# Altium PCB 468524-L.PcbDoc (part 1 of 4)
Units mm, origin at the board's own origin, x right, y up, seen from the top; angles counter-clockwise.
Board outline 160 x 90 mm, 2 copper layers (Top Layer, Bottom Layer), stack 1.571 mm thick; 225 components, 131 nets, 717 pads, 560 vias.
Unrouted connection lines stored in the file: 2.
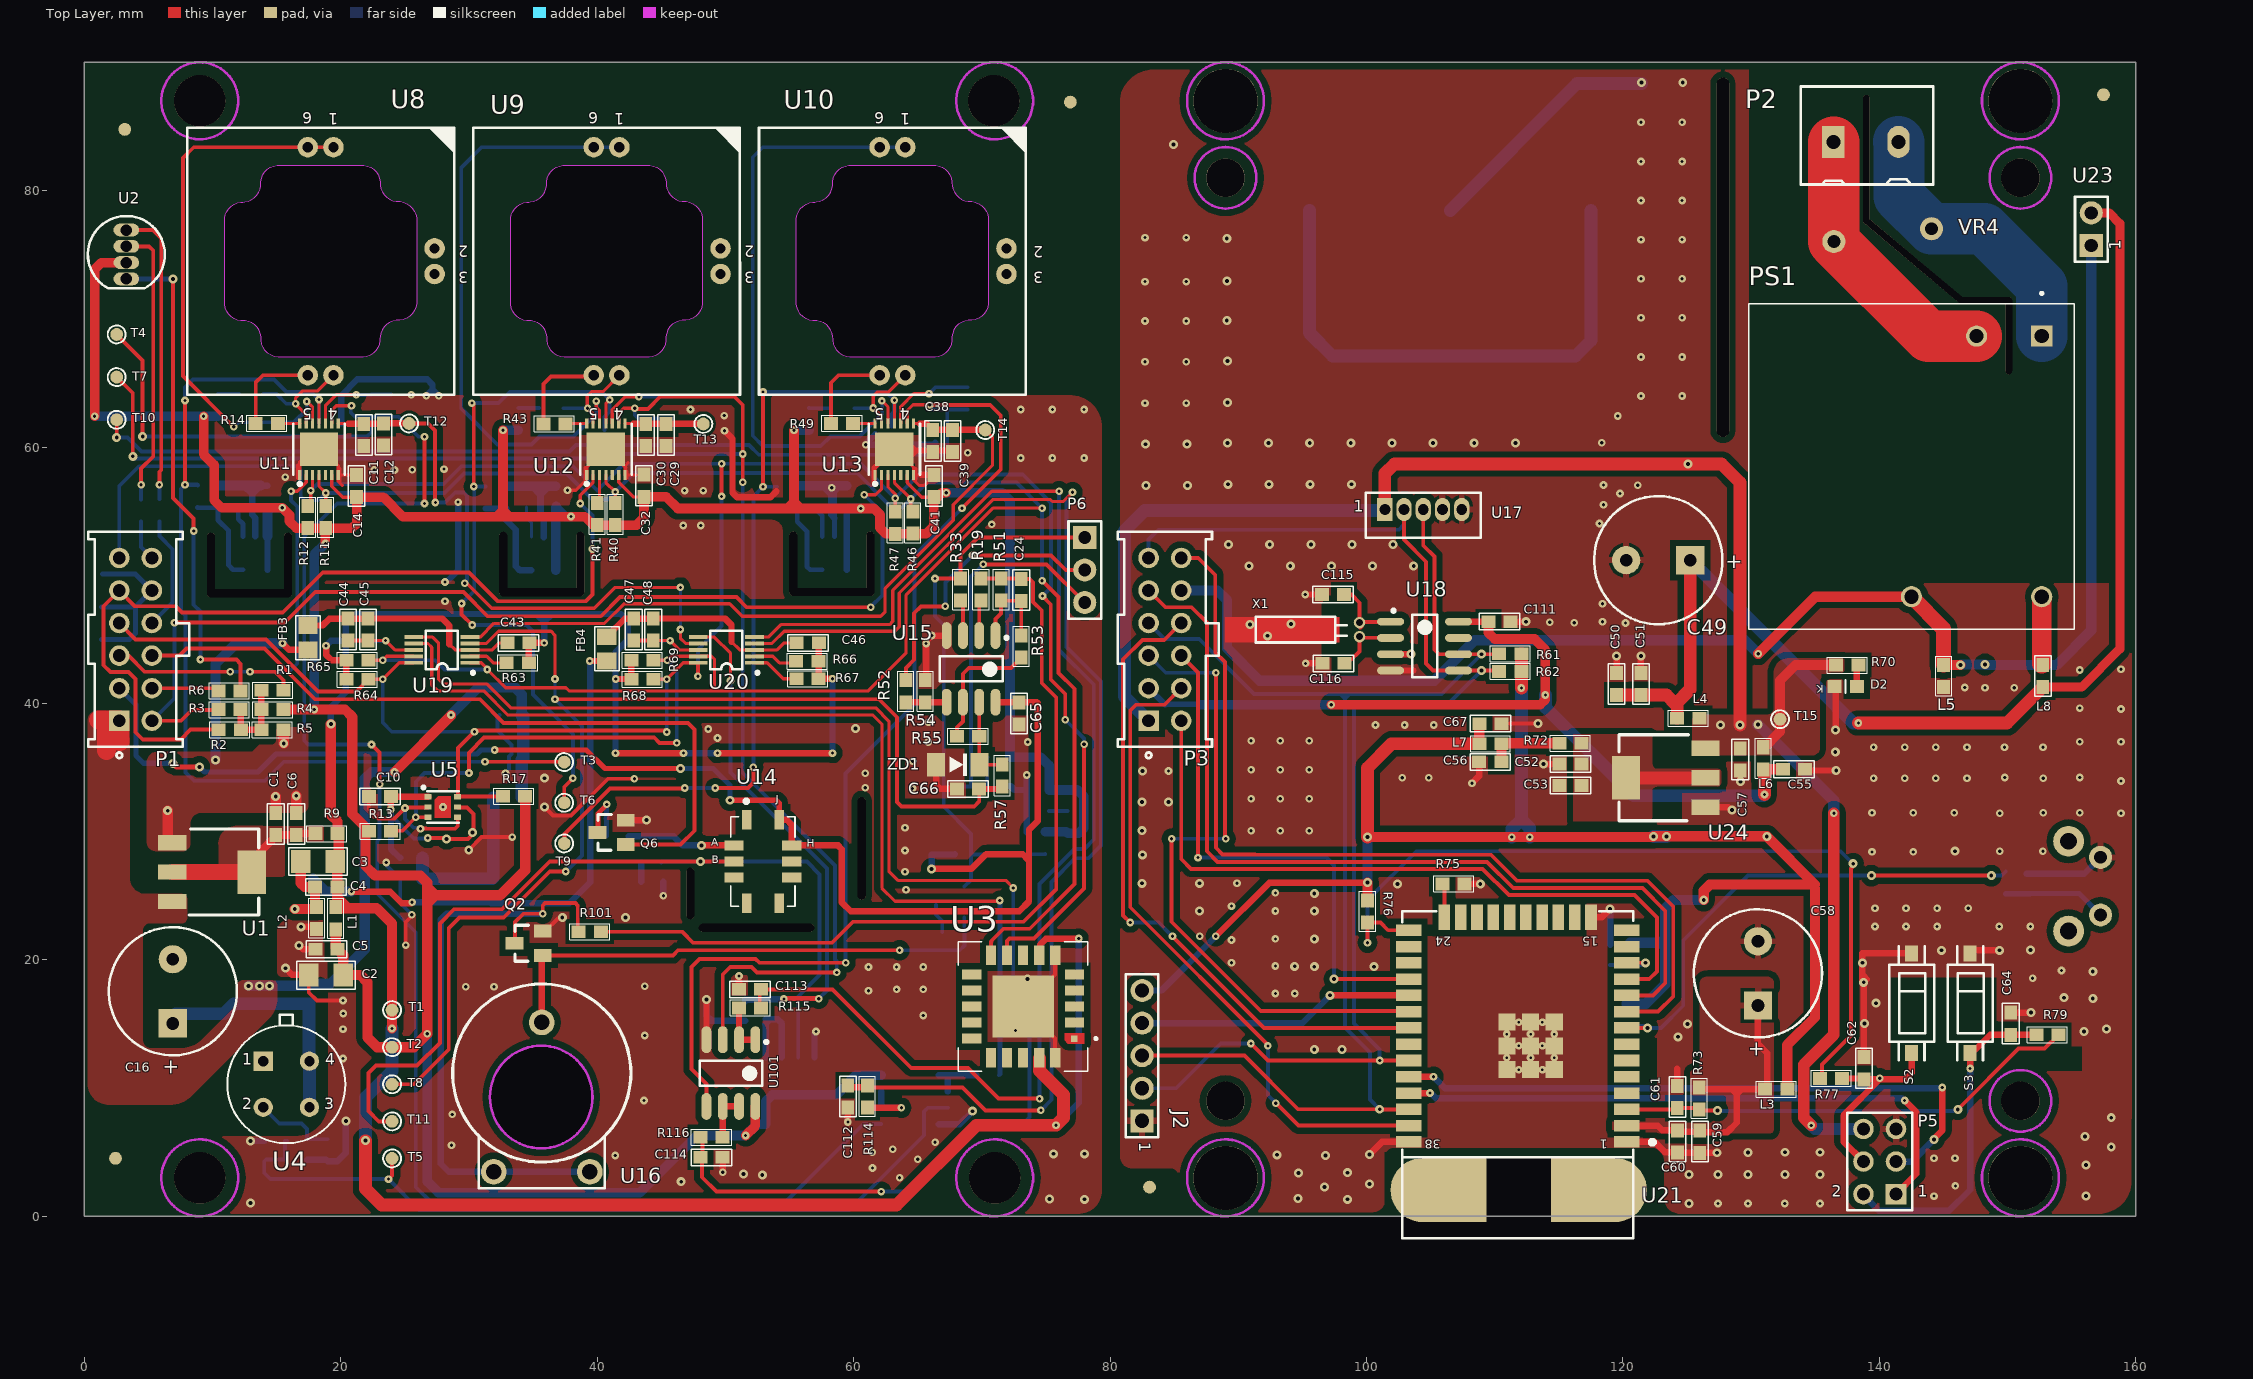
[diagram p0: Top Layer view]
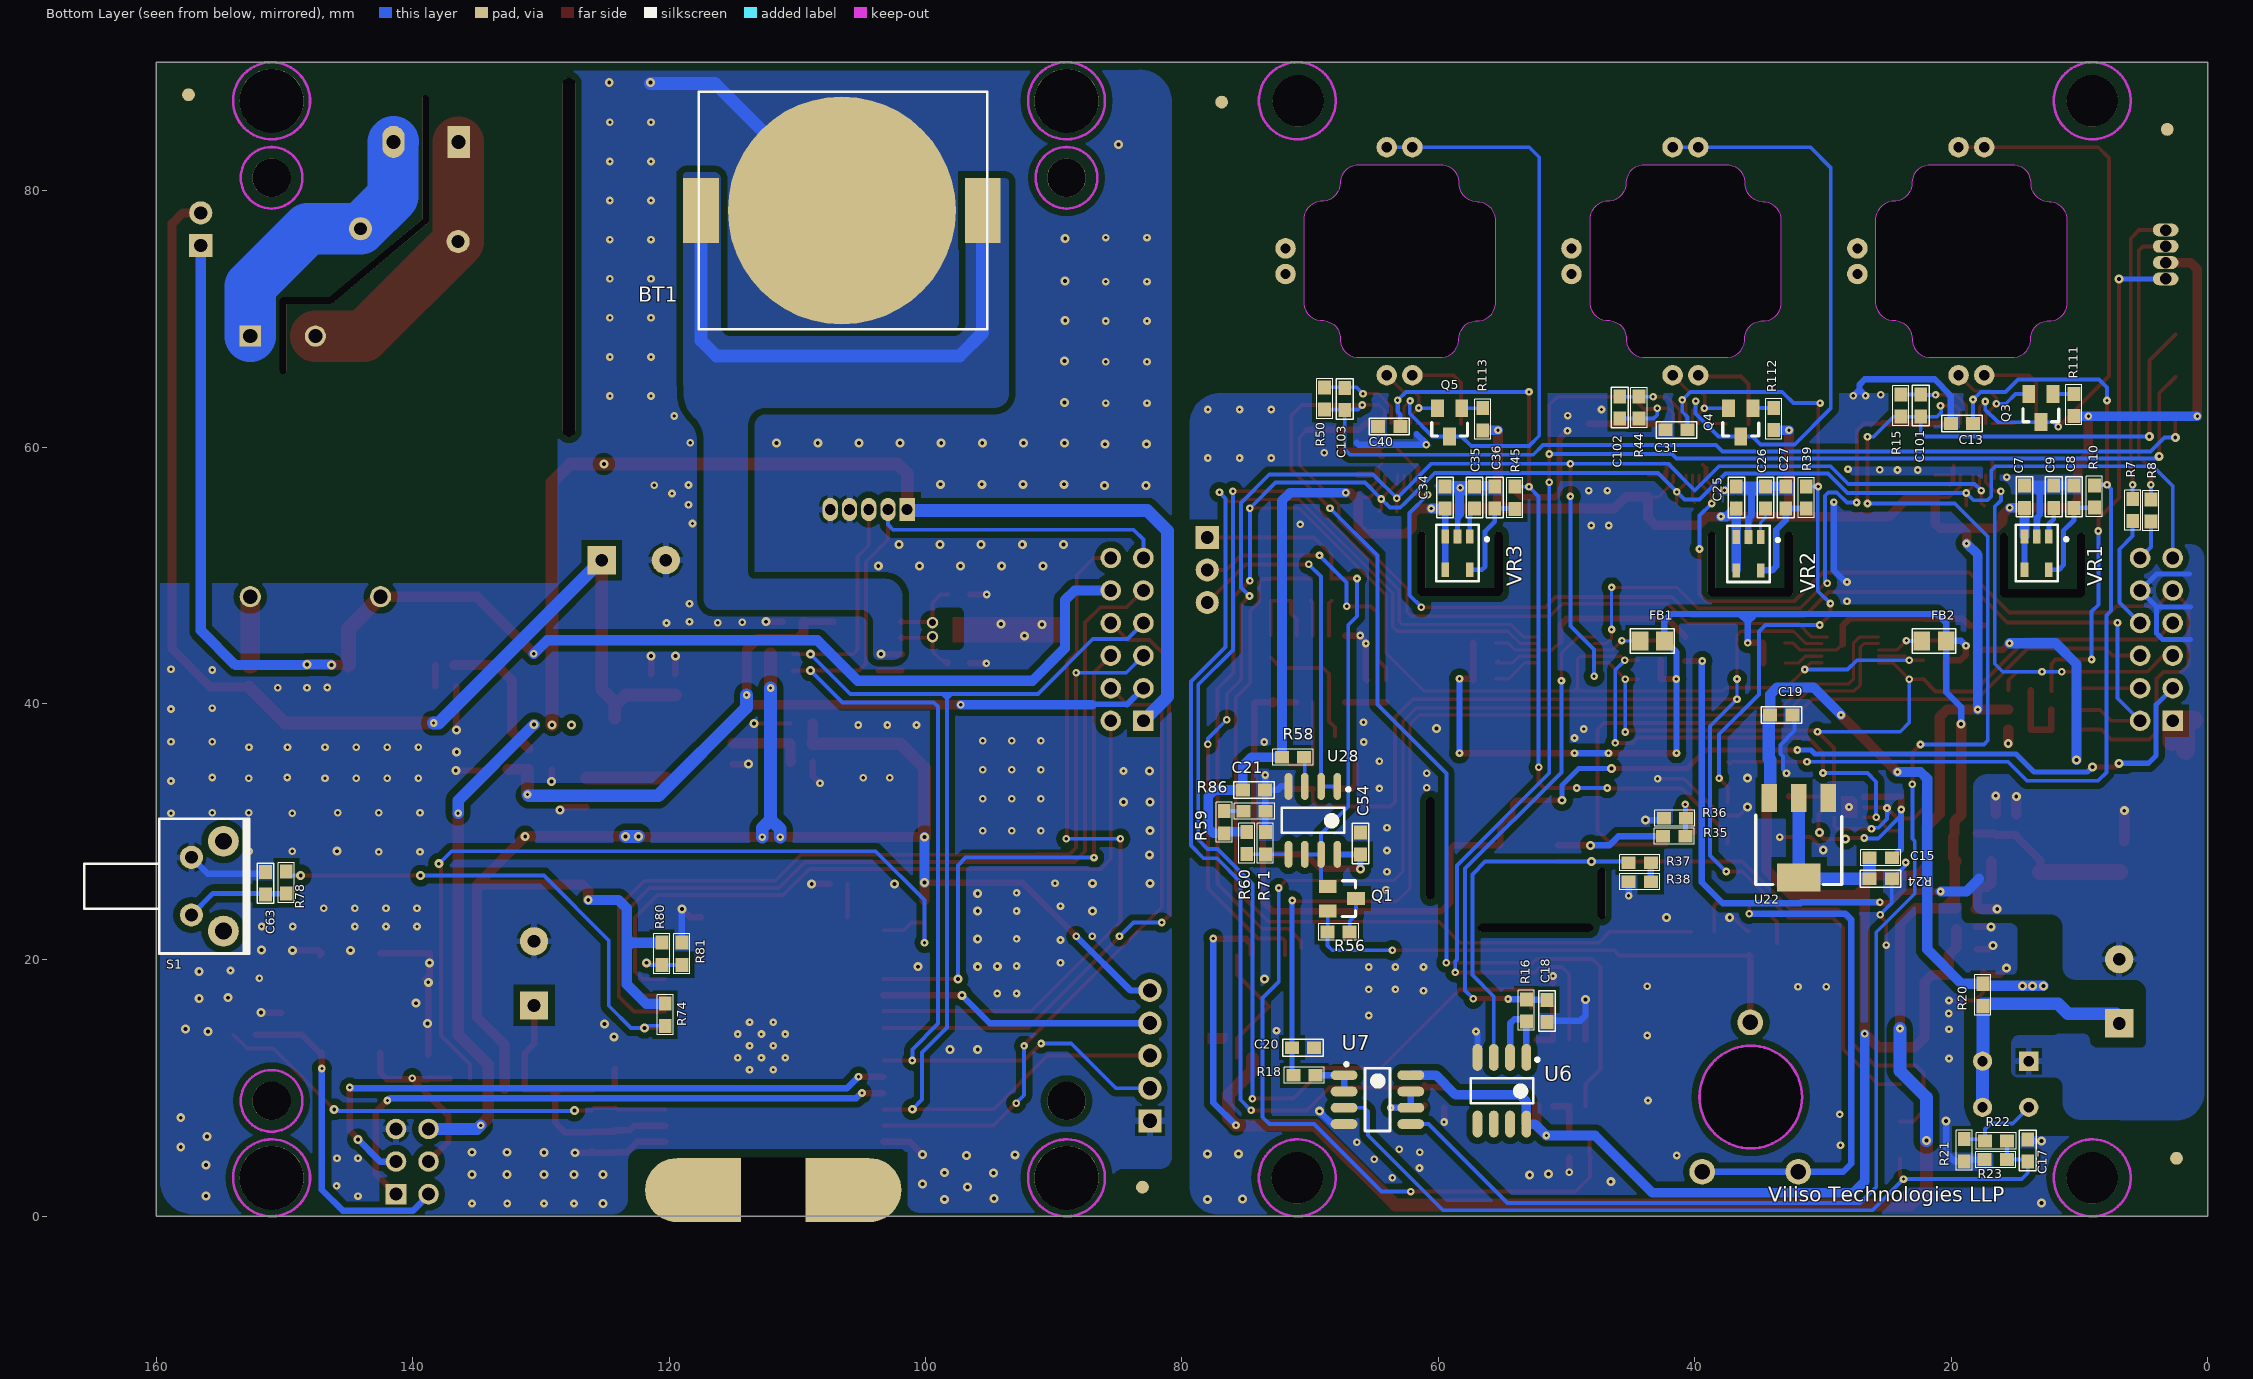
[diagram p1: Bottom Layer view, seen from below]

## Layer stack, top to bottom
Top Solder: solder mask 0.0102, Solder Resist, Dk 3.5
Top Layer: signal copper 0.0356
Dielectric 1: dielectric 1.5, FR-4, Dk 4.8
Bottom Layer: signal copper 0.0356
Bottom Solder: solder mask 0.0102, Solder Resist, Dk 3.5

## Board outline
0,0 160,0 160,90 0,90
cut-out: 36.475,13.225 37.675,12.775 38.3,12.3 38.775,11.75 39.325,10.85 39.55,10.2 39.633,9.304 39.6,8.65 39.375,7.9 39.025,7.175 38.475,6.5 37.85,5.95 36.925,5.525 36.225,5.375 35.35,5.35 34.275,5.55 33.375,5.975 32.7,6.6 32.2,7.2 31.825,8 31.65,8.9 31.65,9.45 31.825,10.575 32.575,11.875 33.575,12.725 35,13.25

## Design rules (kind name [scope] priority, off if disabled: settings)
Clearance Clearance_3 [All vs InPolygon] p1: gap=0.5 ignorepadtopadclearanceinfootprint=FALSE
Clearance Clearance_4 [All vs InComponent('X1')] p2: gap=0.127 ignorepadtopadclearanceinfootprint=FALSE
Clearance Clearance_2 [All vs InComponent('U9') or InComponent('A1') or InComponent('U22')or InComponent('U5')] p3: gap=0.1 ignorepadtopadclearanceinfootprint=FALSE
Clearance Clearance_1 [All vs InComponent('U10') OR InComponent('U13') OR InComponent('U19') OR InComponent('U21') or InComponent('U20')] p4: gap=0.2 ignorepadtopadclearanceinfootprint=TRUE except(0.1: Arc-Arc Arc-Track Arc-Fill Arc-Poly Arc-Region Track-Track Track-Fill Track-Poly Track-Region)
Clearance [All] p5: gap=0.25 ignorepadtopadclearanceinfootprint=FALSE
HoleSize [All] p1: absolutevalues=TRUE maxlimit=10 minlimit=0.025 maxpercent=80.000 minpercent=20.000
MinimumSolderMaskSliver [All] p1 off: minsoldermaskwidth=0.254
PolygonConnect [All] p1: thpad.connectstyle=Relief thpad.reliefconductorwidth=0.5 thpad.reliefentries=4 thpad.polygonreliefangle="90 Angle" thpad.airgapwidth=0.254 smdpad.connectstyle=Direct smdpad.reliefconductorwidth=0.254 smdpad.reliefentries=4 smdpad.polygonreliefangle="90 Angle" smdpad.airgapwidth=0.254 via.connectstyle=Direct via.reliefconductorwidth=0.254 via.reliefentries=4 via.polygonreliefangle="90 Angle" via.airgapwidth=0.254
RoutingVias [All] p1: holewidth=0.3 width=0.7 viastyle="Through Hole" minholewidth=0.1 minwidth=0.4 maxholewidth=0.3 maxwidth=0.7
SilkToSilkClearance [All] p1: silktosilkclearance=0.1
SilkToSolderMaskClearance [IsPad] p1 off: minsilkscreentomaskgap=0.254 clearancetoexposedcopper=TRUE
SolderMaskExpansion [All] p1: expansion=0.102 istentingtop=FALSE
Width [All] p1: maxlimit=5 minlimit=0.01 preferedwidth=0.1
26 further rules are at their usual default settings.

## Classes and differential pairs
component class MGD.SCH2: C1 C2 C3 C4 C5 C6 C7 C8 C9 C10 C11 C12 C13 C14 C15 C16 C17 C18 C19 C20 C21 C24 C25 C26 C27 C29 C30 C31 C32 C34 C35 C36 C38 C39 C40 C41 C43 C44 C45 C46 C47 C48 C54 C65 C66 C101 C102 C103 C112 C113 C114 FB1 FB2 FB3 FB4 L1 L2 P1 P6 Q1 Q2 Q3 Q4 Q5 Q6 R1 R2 R3 R4 R5 R6 R7 R8 R9 R10 R11 R12 R13 R14 R15 R16 R17 R18 R19 R20 R21 R22 R23 R24 R33 R35 R36 R37 R38 R39 R40 R41 R43 R44 R45 R46 R47 R49 R50 R51 R52 R53 R54 R55 R56 R57 R58 R59 R60 R63 R64 R65 R66 R67 R68 R69 R71 R86 R101 R111 R112 R113 R114 R115 R116 T1 T2 T3 T4 T5 T6 T7 T8 T9 T10 T11 T12 T13 T14 U1 U2 U3 U4 U5 U6 U7 U8 U9 U10 U11 U12 U13 U14 U15 U16 U19 U20 U22 U28 U101 VR1 VR2 VR3 ZD1
component class MGD.SCH1: BT1 C49 C50 C51 C52 C53 C55 C56 C57 C58 C59 C60 C61 C62 C63 C64 C67 C111 C115 C116 D2 J2 L3 L4 L5 L6 L7 L8 P2 P3 P5 PS1 R61 R62 R70 R72 R73 R74 R75 R76 R77 R78 R79 R80 R81 S1 S2 S3 T15 U17 U18 U21 U23 U24 VR4 X1

## Components (designator, comment, footprint, x,y, rotation, side; value= is the part's Value field where it differs from the comment)
BT1 "BK-912" BT1 106.525,78.45 r180 bottom
C1 "10µF" C0603 14.925,30.6 r270 top
C2 "100uF" C1206 18.85,18.825 r180 top
C3 "100uF" C1206 18.234,27.686 r180 top
C4 "10uF" C0603 18.859,25.683 r0 top
C5 "0.1µF" C0603 18.875,20.825 r0 top
C6 "10µF" C0603 16.525,30.6 r90 top
C7 "0.1µF" C0603 14.282,56.125 r270 bottom
C8 "56pF" C0603 10.425,56.125 r270 bottom
C9 "56pF" C0603 12.006,56.125 r270 bottom
C10 "0.1uF" C0603 23.05,32.743 r0 top
C11 "1uF" C0603 21.8,60.95 r90 top
C12 "0.1µF" C0603 23.325,60.975 r90 top
C13 "0.022uF" C0603 19.164,61.839 r180 bottom
C14 "0.1µF" C0603 21.225,56.95 r270 top
C15 "10µF" C0603 25.5,26.333 r0 bottom
C16 "470uF/25V" "C16, C49, C58" 6.9,17.55 r90 top
C17 "0.1uF" C0603 14.027,5.125 r270 bottom
C18 "Cap Semi" C0603 51.531,16.017 r90 bottom value=1nF
C19 "10µF" C0603 33.25,39.1 r180 bottom
C20 "Cap Semi" C0603 70.55,13.15 r0 bottom value=1nF
C21 "1uF" C0603 74.375,33.25 r0 bottom
C24 "1uF" C0603 73.075,48.85 r90 top
C25 "0.1µF" C0603 36.756,56.066 r270 bottom
C26 "56pF" C0603 34.486,56.066 r270 bottom
C27 "56pF" C0603 32.9,56.066 r270 bottom
C29 "1uF" C0603 45.359,60.95 r90 top
C30 "0.1µF" C0603 43.795,60.95 r90 top
C31 "0.022uF" C0603 41.425,61.339 r180 bottom
C32 "0.1µF" C0603 43.65,56.975 r270 top
C34 "0.1µF" C0603 59.475,56.066 r270 bottom
C35 "56pF" C0603 57.175,56.066 r270 bottom
C36 "56pF" C0603 55.6,56.066 r270 bottom
C38 "1uF" C0603 66.175,60.475 r90 top
C39 "0.1µF" C0603 67.701,60.475 r90 top
C40 "0.022uF" C0603 63.825,61.6 r180 bottom
C41 "0.1µF" C0603 66.261,56.95 r270 top
C43 "1uF" C0603 33.85,44.725 r0 top
C44 "10uF" C0603 20.564,45.764 r270 top
C45 "1uF" C0603 22.114,45.764 r270 top
C46 "1uF" C0603 56.425,44.725 r0 top
C47 "10uF" C0603 42.842,45.764 r270 top
C48 "1uF" C0603 44.367,45.764 r270 top
C49 "470uF/25V" "C16, C49, C58" 122.75,51.175 r180 top
C50 "10uF" C0603 119.499,41.52 r90 top
C51 "0.1UF" C0603 121.399,41.52 r90 top
C52 "10µF" C0603 115.9,35.27 r0 top
C53 "10µF" C0603 115.9,33.598 r180 top
C54 "1uF" C0603 66.075,29.081 r270 bottom
C55 "0.1µF" C0603 133.346,34.87 r180 top
C56 "10uF" C0603 109.645,35.445 r0 top
C57 "0.1µF" C0603 129.146,35.637 r90 top
C58 "470uF/25V" "C16, C49, C58" 130.525,18.95 r90 top
C59 "10µF" C0603 125.997,5.822 r90 top
C60 "0.1µF" C0603 124.247,5.847 r90 top
C61 "0.1µF" C0603 124.245,9.3 r270 top
C62 "1nF" C0603 138.8,11.55 r270 top
C63 "1nF" C0603 151.475,25.975 r270 bottom
C64 "1nF" C0603 150.25,15.025 r270 top
C65 "1uF" C0603 72.9,39.225 r90 top
C66 "1uF" C0603 68.925,33.325 r0 top
C67 "0.1µF" C0603 109.674,38.426 r180 top
C101 "10uF" C0603 22.371,63.225 r270 bottom
C102 "10uF" C0603 45.85,63.089 r270 bottom
C103 "10uF" C0603 67.3,63.757 r270 bottom
C111 "1uF" C0603 110.381,46.381 r180 top
C112 "Cap Semi" C0603 59.55,9.35 r90 top value=1nF
C113 "Cap Semi" C0603 51.925,17.7 r0 top value=1nF
C114 "Cap Semi" C0603 48.925,4.6 r180 top value=1nF
C115 "0.1UF" C0603 97.375,48.5 r0 top
C116 "0.1UF" C0603 97.425,43.125 r0 top
D2 "LED_GREEN" "D2              L0603" 137.371,41.32 r180 top
FB1 "FB 1.5K" "FB1, FB2, FB3, FB4" 43.317,44.875 r180 bottom
FB2 "FB 1.5K" "FB1, FB2, FB3, FB4" 21.35,44.875 r180 bottom
FB3 "FB 1.5K" "FB1, FB2, FB3, FB4" 17.45,45.125 r270 top
FB4 "FB 1.5K" "FB1, FB2, FB3, FB4" 40.75,44.264 r270 top
J2 "CON_5-BERG_HDC2080" J2 82.5,12.53 r180 top
L1 "1uH" "L3, L4, L5, L6, L7" 19.6,23.25 r270 top
L2 "1uH" "L3, L4, L5, L6, L7" 18.107,23.275 r270 top
L3 "1uH" "L3, L4, L5, L6, L7" 131.95,9.925 r180 top
L4 "1uH" "L3, L4, L5, L6, L7" 125.096,38.845 r0 top
L5 "1uH" "L3, L4, L5, L6, L7" 145.002,42.143 r270 top
L6 "1uH" "L3, L4, L5, L6, L7" 130.946,35.72 r270 top
L7 "1uH" "L3, L4, L5, L6, L7" 109.66,36.851 r180 top
L8 "1uH" C0603 152.75,42.143 r270 top
P1 "Header 6X2" P1,P3_Updated 3.995,45 r90 top locked
P2 "Header 2" "TE 282834-2" 138.95,83.8 r180 top
P3 "Header 6X2" P1,P3_Updated 84.275,45 r90 top locked
P5 "Header 3X2" "P5 - NEW" 140.025,4.272 r180 top
P6 "Header 3" P6 78.025,50.411 r270 top
PS1 "" CONV_LD05-23B03R2 142.5,58.485 r270 top
Q1 "JFET-N" Q1-Q2 67.525,24.775 r270 bottom
Q2 "JFET-N" Q1-Q2 34.65,21.3 r90 top
Q3 "MOSFET-P" Q3-Q5,Q6 13.008,63.037 r0 bottom
Q4 "MOSFET-P" Q3-Q5,Q6 36.413,61.925 r0 bottom
Q5 "MOSFET-P" Q3-Q5,Q6 59.125,61.925 r0 bottom
Q6 "BSS138" Q3-Q5,Q6 41.125,29.94 r90 top
R1 "0E/DNP" R0603 14.675,41.025 r180 top
R2 "0E/DNP" R0603 11.339,37.955 r0 top
R3 "0E/DNP" R0603 11.325,39.525 r0 top
R4 "0E/DNP" R0603 14.675,39.525 r180 top
R5 "0E/DNP" R0603 14.675,37.955 r0 top
R6 "10K" R0603 11.325,40.975 r0 top
R7 "10K" R0603 5.85,55.075 r90 bottom
R8 "10K" R0603 4.425,55.05 r90 bottom
R9 "0E" R0603 18.888,29.85 r180 top
R10 "0E" R0603 8.825,56.151 r90 bottom
R11 "10K/DNP" R0603 18.829,54.537 r90 top
R12 "10K/DNP" R0603 17.429,54.537 r90 top
R13 "10K/DNP" R0603 23.05,30.029 r180 top
R14 "49.9E" R0603 14.225,61.839 r0 top
R15 "510K" R0603 23.921,63.225 r90 bottom
R16 "10K" R0603 53.131,16.065 r270 bottom
R17 "10K/DNP" R0603 33.513,32.761 r0 top
R18 "10K" R0603 70.45,11 r180 bottom
R19 "10K" R0603 69.931,48.875 r270 top
R20 "0E" R0603 17.525,17.275 r90 bottom
R21 "1K" R0603 18.975,5.15 r270 bottom
R22 "1K" R0603 16.502,5.875 r0 bottom
R23 "2K" R0603 16.527,4.425 r180 bottom
R24 "0E" R0603 25.5,27.955 r0 bottom
R33 "10K" R0603 68.336,48.875 r270 top
R35 "75E" R0603 41.6,29.645 r0 bottom
R36 "56E" R0603 41.55,31.037 r180 bottom
R37 "820E" R0603 44.295,27.587 r0 bottom
R38 "0E" R0603 44.295,26.093 r180 bottom
R39 "0E" R0603 31.3,56.066 r90 bottom
R40 "10K/DNP" R0603 41.4,54.775 r90 top
R41 "0E/DNP" R0603 39.993,54.775 r90 top
R43 "49.9E" R0603 36.675,61.8 r0 top
R44 "100K" R0603 44.35,63.075 r90 bottom
R45 "0E" R0603 54.025,56.041 r90 bottom
R46 "10K/DNP" R0603 64.625,54.1 r90 top
R47 "0E/DNP" R0603 63.236,54.093 r90 top
R49 "49.9E" R0603 59.102,61.839 r0 top
R50 "100K" R0603 68.875,63.793 r90 bottom
R51 "470K" R0603 71.5,48.875 r270 top
R52 "10K" R0603 64.075,40.95 r270 top
R53 "10K" R0603 73.075,44.45 r270 top
R54 "100K" R0603 65.575,40.95 r270 top
R55 "100K" R0603 68.931,37.446 r0 top
R56 "2M" R0603 67.775,22.175 r0 bottom
R57 "100E" R0603 71.581,34.37 r270 top
R58 "100k" R0603 71.325,35.8 r180 bottom
R59 "100K" R0603 76.7,30.739 r270 bottom
R60 "130K" R0603 74.948,29.123 r90 bottom
R61 "10K/DNP/TX" R0603 111.214,43.875 r0 top
R62 "10K/DNP/TX" R0603 111.214,42.495 r0 top
R63 "10K" R0603 33.8,43.165 r180 top
R64 "10K" R0603 21.3,41.895 r0 top
R65 "10K" R0603 21.3,43.365 r0 top
R66 "10K" R0603 56.375,43.29 r180 top
R67 "10K" R0603 56.4,41.925 r180 top
R68 "10K" R0603 43.52,41.895 r0 top
R69 "10K" R0603 43.52,43.365 r0 top
R70 "10K" R0603 137.496,42.995 r0 top
R71 "200K" R0603 73.486,29.098 r270 bottom
R72 "0E" R0603 115.896,36.895 r0 top
R73 "10K" R0603 125.947,9.2 r270 top
R74 "10K" R0603 120.3,15.725 r270 bottom
R75 "10K" R0603 106.779,25.925 r180 top
R76 "10K" R0603 100.075,23.775 r270 top
R77 "470E" R0603 136.225,10.75 r180 top
R78 "470E" R0603 149.85,26.025 r90 bottom
R79 "470E" R0603 153.1,14.15 r0 top
R80 "10K/ NTC" R0603 120.551,20.48 r270 bottom
R81 "10K" R0603 118.996,20.48 r90 bottom
R86 "100K" R0603 74.35,31.593 r0 bottom
R101 "75E" R0603 39.414,22.2 r0 top
R111 "10K" R0603 10.425,63.275 r270 bottom
R112 "10K" R0603 33.844,62.175 r270 bottom
R113 "10K" R0603 56.525,62.164 r270 bottom
R114 "10K" R0603 61.075,9.35 r270 top
R115 "10K" R0603 51.925,16.25 r180 top
R116 "10K" R0603 48.925,6.175 r0 top
S1 "SW-SPST" S1 156,25.75 r90 bottom locked
S2 "SW-PB" "S2, S3" 142.515,16.625 r90 top
S3 "SW-PB" "S2, S3" 147.075,16.625 r90 top
T1 "TEST POINT" TP 24,16.082 r0 top
T2 "TEST POINT" TP 24,13.191 r0 top
T3 "TEST POINT" TP 37.425,35.425 r0 top
T4 "TEST POINT" TP 2.52,68.783 r0 top
T5 "TEST POINT" TP 24,4.517 r0 top
T6 "TEST POINT" TP 37.425,32.255 r0 top
T7 "TEST POINT" TP 2.52,65.454 r0 top
T8 "TEST POINT" TP 24,10.3 r90 top
T9 "TEST POINT" TP 37.425,29.085 r0 top
T10 "TEST POINT" TP 2.52,62.125 r0 top
T11 "TEST POINT" TP 24,7.408 r0 top
T12 "TEST POINT" TP 25.325,61.839 r90 top
T13 "TEST POINT" TP 48.275,61.8 r90 top
T14 "TEST POINT" TP 70.264,61.325 r90 top
T15 "TEST POINT" TP 132.246,38.77 r0 top
U1 "='Texas Instruments'PartNumber" "U1, U24              SOT-223" 9.95,26.85 r270 top
U2 "RGB_LED" U2 3.275,75.018 r180 top
U3 "SCD41" XDCR_SCD41-D-R2 73.215,16.364 r180 top
U4 "TGS2610" U4 15.752,10.3 r0 top
U5 "SGP30" SGP30 27.965,31.925 r0 top locked
U6 "LM258DT" "U6, U8                    SOIC-8N" 55.041,9.795 r270 bottom
U7 "LM258DT" "U6, U8                    SOIC-8N" 64.747,9.1 r180 bottom
U8 "SPEC_SENS_PTH_SO2" "U3, U7, U11" 18.425,74.49 r180 top locked
U9 "SPEC_SENS_PTH_SO2" "U3, U7, U11" 40.725,74.49 r180 top locked
U10 "SPEC_SENS_PTH_SO2" "U3, U7, U11" 63.025,74.49 r180 top locked
U11 "LMP91000SD/NOPB" "U5, U10, U13" 18.3,59.825 r90 top
U12 "LMP91000SD/NOPB" "U5, U10, U13" 40.675,59.825 r90 top
U13 "LMP91000SD/NOPB" "U5, U10, U13" 63.175,59.825 r90 top
U14 "MICS2714_NO2" U12 52.925,27.675 r0 top
U15 "LM258DT" "U6, U8                    SOIC-8N" 69.156,42.695 r270 top
U16 "TGS5141_CO" U16 35.675,9.3 r0 top
U17 "SPS30" U17 104.425,54.225 r180 top
U18 "DS1307Z" "U18 new" 104.525,44.476 r0 top
U19 "ADS1115IDGSR-MSOP" "U19, U20" 27.875,44.175 r180 top
U20 "ADS1115IDGSR-MSOP" "U19, U20" 50.063,44.175 r180 top
U21 "ESP_32" "U20             ESP 32" 111.792,14.557 r180 top
U22 "='Texas Instruments'PartNumber" "U1, U24              SOT-223" 31.885,29.525 r0 bottom
U23 "RST_CON_BERG_2.54MM" U23 156.525,76.995 r180 top
U24 "='Texas Instruments'PartNumber" "U1, U24              SOT-223" 123.346,34.2 r90 top
U28 "LM258DT" U28 69.779,30.877 r270 bottom
U101 "LM258DT" "U6, U8                    SOIC-8N" 50.425,11.175 r270 top
VR1 "LM4120AIM5-2.5" "VR1, VR2, VR3" 13.332,51.729 r0 bottom
VR2 "LM4120AIM5-2.5" "VR1, VR2, VR3" 35.813,51.674 r0 bottom
VR3 "LM4120AIM5-2.5" "VR1, VR2, VR3" 58.502,51.724 r0 bottom
VR4 "" Mov 140.25,76.525 r180 top value="=Resistance In Ohms @ 25C"
X1 "32.768kHz" XTAL 99.45,45.755 r90 top
ZD1 "D Zener" ZD1 68.131,35.221 r0 top

## Footprints (in the part's own frame and the unit in brackets; to place one, negate y for a bottom-side part, rotate by r counter-clockwise, add the part's x,y. Pads: shape width x height; smd on the part's side, far side on the other; paste and mask are expansions set on the pad)
BT1 [mm]
  round 17.78 smd: 1(0,0)
  rect 2.79x5.08 smd: S1(-10.985,0) S2(10.985,0)
  silkscreen extent -11.15,-9.25 11.35,9.28, body extent -11.23,-7.82 11.63,7.42, height 4.32
"C16, C49, C58" [mm]
  rect 2.2x2.2 hole 1: 1(-2.5,0)
  round 2.2 hole 1: 2(2.5,0)
  silkscreen extent -5,-5 5,5
C0603 [mil]
  rect 43x39 smd: 1(-34.03,0) 2(34.03,0)
  silkscreen extent -62,-26 62,26, body extent -31,-16 31,16, height 12
C1206 [mil]
  rect 60x70.9 smd paste+0 mask+4: 1(-53,0) 2(53,0)
  silkscreen extent -90,-42 90,43, body extent -63,-31 63,31, height 39
CONV_LD05-23B03R2 [mm]
  rect 1.65x1.65 hole 1.1: 1(-10.16,10.16)
  round 1.65 hole 1.1: 2(-10.16,5.08) 4(10.16,0) 5(10.16,10.16)
  silkscreen extent -13.6,-12.7 12.7,12.7, body extent -12.7,-12.7 12.7,12.7, height 17.6
"D2              L0603" [mil]
  rect 43x39 smd: 1(-34,0) 2(34,0)
  silkscreen extent 0,-20 0,20, body extent -32,-16 31,16, height 24
"FB1, FB2, FB3, FB4" [mil] "R0603"
  rect 51x59 smd: 1(-37.5,0) 2(37.5,0)
  silkscreen extent -67,-37 67,37, body extent -39,-24 39,24, height 37
J2 [mm]
  rect 1.8x1.8 hole 1.1: 1(0,5.08)
  round 1.8 hole 1.1: 2(0,2.54) 3(0,0) 4(0,-2.54) 5(0,-5.08)
  silkscreen extent -1.27,-6.35 1.27,6.35, body extent -1.27,-6.35 1.27,6.35, height 9.07
"L3, L4, L5, L6, L7" [mil] "R0603"
  rect 43x39 smd: 1(-34,0) 2(34,0)
  silkscreen extent -61,-25 61,25, body extent -33,-16 33,16, height 22
Mov [mm]
  round 1.8 hole 1: 1(-3.81,-0.5) 2(3.8,0.5)
  body extent -5.5,-0.9 5.8,0.95, height 18.5
P1,P3_Updated [mm]
  rect 1.6x1.6 hole 1: 1(-6.35,1.27)
  round 1.6 hole 1: 2(-3.81,1.27) 3(-1.27,1.27) 4(1.27,1.27) 5(3.81,1.27) 6(6.35,1.27) 7(-6.35,-1.27) 8(-3.81,-1.27) 9(-1.27,-1.27) 10(1.27,-1.27) 11(3.81,-1.27) 12(6.35,-1.27)
  silkscreen extent -9.27,-4.2 8.38,3.67
"P5 - NEW" [mm]
  rect 1.6x1.6 hole 1: 1(-1.27,2.54)
  round 1.6 hole 1: 2(1.27,2.54) 3(-1.27,0) 4(1.27,0) 5(-1.27,-2.54) 6(1.27,-2.54)
  silkscreen extent -2.54,-3.81 2.54,3.81, body extent -2.54,-3.81 2.54,3.81, height 8.57
P6 [mm]
  rect 1.8x1.8 hole 1: 1(-2.54,0)
  round 1.8 hole 1: 2(0,0) 3(2.54,0)
  silkscreen extent -3.81,-1.27 3.81,1.27, body extent -3.78,-1.22 3.84,1.32, height 9.07
Q1-Q2 [mm]
  rect 1x1.4 smd: 1(-0.95,-1.1) 2(0,1.1) 3(0.95,-1.1)
  silkscreen extent -1.4,0.04 1.4,1.06, body extent -1.5,-1.25 1.5,1.25, height 1.55
Q3-Q5,Q6 [mm]
  rect 1x1.4 smd: 1(-0.95,-1.1) 2(0.95,-1.1) 3(0,1.1)
  silkscreen extent -1.4,0.04 1.4,1.06, body extent -1.5,-1.25 1.5,1.25, height 1.55
R0603 [mil] "R0603"
  rect 43x39 smd: 1(-34,0) 2(34,0)
  silkscreen extent -62,-25 61,25, body extent -33,-16 33,16, height 22
S1 [mm]
  round 1.8 hole 1: 1(-2.25,1.25) 2(2.25,1.25)
  round 2.4 hole 1.3: ""(-3.5,-1.25) ""(3.5,-1.25)
  silkscreen extent -5.38,-3.25 5.32,9.6
"S2, S3" [mm]
  rect 1.25x1 smd: 1(-3.875,0) 2(3.875,0)
  silkscreen extent -4.46,-1.75 4.45,1.75
SGP30 [mm]
  rect 0.55x0.4 smd paste-1: 1(-1.15,0.8) 2(-1.15,0) 3(-1.15,-0.8) 4(1.15,-0.8) 5(1.15,0) 6(1.15,0.8)
  rect 0.305x0.61 smd paste-1 mask+0: DIEPAD(0,0)
  Top Layer region: 0.625,-0.85 -0.625,-0.85 -0.625,0.575 -0.35,0.85 0.625,0.85
  silkscreen extent -1.65,-1.22 1.22,1.65, body extent -1.22,-1.22 1.22,1.22, height 0.88
"TE 282834-2" [mm]
  oval 1.75x2.5 hole 1.1: 1(-2.54,0)
  rect 1.75x2.5 hole 1.1: 2(2.54,0)
  silkscreen extent -5.24,-4.32 5.08,3.33, body extent -5.08,-4.33 5.08,3.17, height 10
TP [mm]
  round 1 smd paste-1 mask+0.102: 1(0,0)
  silkscreen extent -0.7,-0.7 0.7,0.7
"U1, U24              SOT-223" [mm]
  rect 1.2x2.2 smd: 1(-2.3,-3.1) 2(0,-3.1) 3(2.3,-3.1)
  rect 3.4x2.2 smd: 4(0,3.1)
  silkscreen extent -3.35,-1.77 3.35,3.65, body extent -3.26,-3.47 3.24,3.49, height 1.9
U2 [mm]
  oval 2x1 hole 0.9: 1(0,1.905) 2(0,0.635) 3(0,-0.635) 4(0,-1.905)
  silkscreen extent -3,-3 3,2.65
"U3, U7, U11" [mm]
  round 1.6 hole 0.8: 1(-1,-8.89) 2(-8.89,-1) 3(-8.89,1) 4(-1,8.89) 5(1,8.89) 6(1,-8.89)
  Keep-Out Layer board cut-out: 3.597,7.442 3.863,7.331 4.103,7.171 4.307,6.967 4.467,6.727 4.578,6.461 4.634,6.178 4.634,6.034 4.641,5.898 4.694,5.63 4.798,5.378 4.95,5.152 5.143,4.959 5.369,4.807 5.621,4.703 5.889,4.65 6.025,4.643 6.209,4.643 6.483,4.588 6.742,4.481 6.974,4.326 7.172,4.128 7.327,3.896 7.434,3.637 7.489,3.363 7.489,3.223 7.489,-3.199 7.489,-3.339 7.434,-3.613 7.327,-3.872 7.172,-4.104 6.974,-4.302 6.742,-4.457 6.483,-4.564 6.209,-4.619 6.069,-4.619 5.931,-4.626 5.661,-4.68 5.406,-4.785 5.177,-4.938 4.982,-5.133 4.829,-5.362 4.724,-5.617 4.67,-5.887 4.663,-6.025 4.663,-6.068 4.663,-6.206 4.609,-6.478 4.503,-6.734 4.349,-6.964 4.153,-7.16 3.923,-7.314 3.667,-7.42 3.395,-7.474 -3.374,-7.474 -3.646,-7.42 -3.902,-7.314 -4.132,-7.16 -4.328,-6.964 -4.482,-6.734 -4.588,-6.478 -4.642,-6.206 -4.642,-6.068 -4.649,-5.93 -4.703,-5.66 -4.808,-5.405 -4.961,-5.176 -5.156,-4.981 -5.385,-4.828 -5.64,-4.723 -5.91,-4.669 -6.048,-4.662 -6.202,-4.662 -6.476,-4.607 -6.735,-4.5 -6.968,-4.345 -7.166,-4.147 -7.321,-3.914 -7.428,-3.655 -7.483,-3.381 -7.483,-3.241 -7.483,3.165 -7.483,3.308 -7.427,3.588 -7.318,3.851 -7.16,4.089 -6.958,4.291 -6.72,4.449 -6.457,4.558 -6.177,4.614 -6.034,4.614 -5.896,4.621 -5.626,4.675 -5.371,4.78 -5.142,4.933 -4.947,5.128 -4.794,5.357 -4.689,5.612 -4.635,5.882 -4.628,6.02 -4.628,6.049 -4.628,6.192 -4.572,6.472 -4.463,6.735 -4.305,6.973 -4.103,7.175 -3.865,7.333 -3.602,7.442 -3.322,7.498 3.314,7.498
  Keep-Out Layer region: -7.483,3.165 -7.483,3.308 -7.427,3.588 -7.318,3.851 -7.16,4.089 -6.958,4.291 -6.72,4.449 -6.457,4.558 -6.177,4.614 -6.034,4.614 -5.896,4.621 -5.626,4.675 -5.371,4.78 -5.142,4.933 -4.947,5.128 -4.794,5.357 -4.689,5.612 -4.635,5.882 -4.628,6.02 -4.628,6.02 -4.628,6.049 -4.628,6.192 -4.572,6.472 -4.463,6.735 -4.305,6.973 -4.103,7.175 -3.865,7.333 -3.602,7.442 -3.322,7.498 -3.179,7.498 -3.179,7.498 3.17,7.498 3.314,7.498 3.597,7.442 3.863,7.331 4.103,7.171 4.307,6.967 4.467,6.727 4.578,6.461 4.634,6.178 4.634,6.034 4.641,5.898 4.694,5.63 4.798,5.378 4.95,5.152 5.143,4.959 5.369,4.807 5.621,4.703 5.889,4.65 6.025,4.643 6.025,4.643 6.069,4.643 6.209,4.643 6.483,4.588 6.742,4.481 6.974,4.326 7.172,4.128 7.327,3.896 7.434,3.637 7.489,3.363 7.489,3.223 7.489,3.223 7.489,-3.199 7.489,-3.339 7.434,-3.613 7.327,-3.872 7.172,-4.104 6.974,-4.302 6.742,-4.457 6.483,-4.564 6.209,-4.619 6.069,-4.619 5.931,-4.626 5.661,-4.68 5.406,-4.785 5.177,-4.938 4.982,-5.133 4.829,-5.362 4.724,-5.617 4.67,-5.887 4.663,-6.025 4.663,-6.025 4.663,-6.068 4.663,-6.206 4.609,-6.478 4.503,-6.734 4.349,-6.964 4.153,-7.16 3.923,-7.314 3.667,-7.42 3.395,-7.474 3.257,-7.474 3.257,-7.474 -3.236,-7.474 -3.374,-7.474 -3.646,-7.42 -3.902,-7.314 -4.132,-7.16 -4.328,-6.964 -4.482,-6.734 -4.588,-6.478 -4.642,-6.206 -4.642,-6.068 -4.649,-5.93 -4.703,-5.66 -4.808,-5.405 -4.961,-5.176 -5.156,-4.981 -5.385,-4.828 -5.64,-4.723 -5.91,-4.669 -6.048,-4.662 -6.048,-4.662 -6.062,-4.662 -6.202,-4.662 -6.476,-4.607 -6.735,-4.5 -6.968,-4.345 -7.166,-4.147 -7.321,-3.914 -7.428,-3.655 -7.483,-3.381 -7.483,-3.241 -7.483,-3.241
  silkscreen extent -10.41,-10.41 10.41,10.41
U4 [mm]
  rect 1.5x1.5 hole 0.8: 1(-1.8,1.8)
  round 1.5 hole 0.8: 2(-1.8,-1.8) 3(1.8,-1.8) 4(1.8,1.8)
  silkscreen extent -4.6,-4.6 4.6,5.43
"U5, U10, U13" [mm]
  rect 0.8x0.25 smd: 1(-2,1.5) 2(-2,1) 3(-2,0.5) 4(-2,0) 5(-2,-0.5) 6(-2,-1) 7(-2,-1.5) 8(2,-1.5) 9(2,-1) 10(2,-0.5) 11(2,0) 12(2,0.5) 13(2,1) 14(2,1.5)
  rect 2.6x3 smd: 15(0,0)
  silkscreen extent -2.82,-2 2,2
"U6, U8                    SOIC-8N" [mm]
  oval 2.1x0.762 smd: 1(-2.6,1.905) 2(-2.6,0.635) 3(-2.6,-0.635) 4(-2.6,-1.905) 5(2.6,-1.905) 6(2.6,-0.635) 7(2.6,0.635) 8(2.6,1.905)
  silkscreen extent -2.55,-2.44 0.98,2.89, body extent -2.99,-2.45 3,2.45, height 1.7
U12 [mm]
  rect 0.762x1.5 smd: 1(-1.27,3.25) 5(-1.27,-3.25) 6(1.27,-3.25) 10(1.27,3.25)
  rect 1.5x0.762 smd: 2(-2.25,1.25) 3(-2.25,0) 4(-2.25,-1.25) 7(2.25,-1.25) 8(2.25,0) 9(2.25,1.25)
  silkscreen extent -2.5,-3.5 2.5,4.84
U16 [mm] "Connector; Header; 9 Position"
  round 2 hole 1.2: 1(0,5.825) 2(-3.75,-5.825) 3(3.75,-5.825)
  silkscreen extent -6.95,-7.12 6.95,8.82
U17 [mm]
  rect 1.2x1.8 hole 0.85: 1(3,-0.9)
  oval 1.2x1.8 hole 0.85: 2(1.5,-0.9) 3(0,-0.9) 4(-1.5,-0.9) 5(-3,-0.9)
  silkscreen extent -4.5,-2.2 4.5,1.3
"U18 new" [mm]
  oval 2.1x0.6 smd: 1(-2.65,1.905) 2(-2.65,0.635) 3(-2.65,-0.635) 4(-2.65,-1.905) 5(2.65,-1.905) 6(2.65,-0.635) 7(2.65,0.635) 8(2.65,1.905)
  silkscreen extent -2.55,-2.44 0.98,2.89, body extent -2.99,-2.45 3,2.45, height 1.7
"U19, U20" [mm]
  rect 1.45x0.3 smd mask+0.08: 1(-2.2,1) 2(-2.2,0.5) 3(-2.2,0) 4(-2.2,-0.5) 5(-2.2,-1) 6(2.2,-1) 7(2.2,-0.5) 8(2.2,0) 9(2.2,0.5) 10(2.2,1)
  silkscreen extent -2.55,-1.5 1.25,1.9
"U20             ESP 32" [mm]
  rect 2x0.9 smd: 1(-8.5,8.755) 2(-8.5,7.485) 3(-8.5,6.215) 4(-8.5,4.945) 5(-8.5,3.675) 6(-8.5,2.405) 7(-8.5,1.135) 8(-8.5,-0.135) 9(-8.5,-1.405) 10(-8.5,-2.675) 11(-8.5,-3.945) 12(-8.5,-5.215) 13(-8.5,-6.485) 14(-8.5,-7.755) 25(8.5,-7.755) 26(8.5,-6.485) 27(8.5,-5.215) 28(8.5,-3.945) 29(8.5,-2.675) 30(8.5,-1.405) 31(8.5,-0.135) 32(8.5,1.135) 33(8.5,2.405) 34(8.5,3.675) 35(8.5,4.945) 36(8.5,6.215) 37(8.5,7.485) 38(8.5,8.755)
  rect 0.9x2 smd: 15(-5.715,-8.755) 16(-4.445,-8.755) 17(-3.175,-8.755) 18(-1.905,-8.755) 19(-0.635,-8.755) 20(0.635,-8.755) 21(1.905,-8.755) 22(3.175,-8.755) 23(4.445,-8.755) 24(5.715,-8.755)
  rect 1.33x1.33 smd: 39(-2.85,3.115) 39(-2.85,-0.585) 39(-2.85,1.265) 39(-1,3.115) 39(-1,1.265) 39(-1,-0.585) 39(0.85,3.115) 39(0.85,1.265) 39(0.85,-0.585)
  silkscreen extent -10.6,-9.24 9,16.26, body extent -9.06,-9.29 9.01,16.25, height 3.2
U23 [mm]
  rect 1.8x1.8 hole 1.02: 1(0,1.27)
  round 1.8 hole 1.02: 2(0,-1.27)
  silkscreen extent -1.27,-2.54 1.27,2.54
U28 [mm]
  oval 2.1x0.6 smd: 1(-2.65,1.905) 2(-2.65,0.635) 3(-2.65,-0.635) 4(-2.65,-1.905) 5(2.65,-1.905) 6(2.65,-0.635) 7(2.65,0.635) 8(2.65,1.905)
  silkscreen extent -2.55,-2.44 0.98,2.89, body extent -2.99,-2.45 3,2.45, height 1.7
"VR1, VR2, VR3" [mm] "SOT-23/SC-74A; 5 Leads; Body 3 x 3 mm, inc. leads (LxW max)"
  rect 0.6x1.1 smd: 1(-0.95,-1.3) 2(0,-1.3) 3(0.95,-1.3) 4(0.95,1.3) 5(-0.95,1.3)
  silkscreen extent -2.42,-2.2 1.65,2.2, body extent -1.5,-1.25 1.5,1.25, height 1.15
XDCR_SCD41-D-R2 [mm]
  rect 0.5x0.5 smd paste-1 mask+0: 1(-4,2.5)
  rect 1.5x0.8 smd paste-0.125 mask+0.1: 2(-4,1.25) 3(-4,0) 4(-4,-1.25) 5(-4,-2.5) 11(4,-2.5) 12(4,-1.25) 13(4,0) 14(4,1.25) 15(4,2.5)
  rect 0.8x1.5 smd paste-0.125 mask+0.1: 6(-2.5,-4) 7(-1.25,-4) 8(0,-4) 9(1.25,-4) 10(2.5,-4) 16(2.5,4) 17(1.25,4) 18(0,4) 19(-1.25,4) 20(-2.5,4)
  rect 4.8x4.8 smd paste-3 mask+0.1: 21(0,0)
  Top Layer region: -3.25,2.65 -3.25,2.1 -4.75,2.1 -4.75,2.9 -3.5,2.9
  silkscreen extent -5.77,-5.05 5.05,5.05, body extent -5.05,-5.48 5.05,0.83, height 5.05
XTAL [mm]
  round 0.9 hole 0.55: 1(0.55,0) 2(-0.55,0)
  silkscreen extent -1,1.02 1,8.09
ZD1 [mm]
  rect 1.4x1.8 smd: 1(-1.7,0) 2(1.7,0)
  silkscreen extent -0.64,-0.87 0.69,0.88, body extent -1.82,-0.8 1.88,0.8, height 1.6

## Part data
BT1: "BATTERY RETAINER COIN 20MM SMD", PACKAGE=None, Supplier Part Number 1=BK-912-ND, Availability=Unavailable, MF=MPD, MP=BK-912, Price=None, SnapEDA_Link=https://www.snapeda.com/parts/BK-912/Memory%20Protection%20Devices/view-part/4219672/?ref=snap, Supplier 1=Digi-Key
C1 C6 C15 C19 C52 C53: library part CAP_C_10µF/35V, "CAP CER SMD 10µF/35V", MANUFACTURER="Taiyo Yuden", Manufacturer Part Number=GMK316AB7106KL-TR, Operating Temperature="-55°C ~ 125°C", Package / Case="1206 (3216 Metric)", Ratings=-, Supplier Part Number 1=587-3007-1-ND, Temperature Coefficient=X7R, Tolerance=±10%, Voltage - Rated=35V, Applications="General Purpose", Capacitance=10µF, Category=Capacitors, ComponentLink1Description=http://www.yuden.co.jp/productdata/catalog/en/mlcc06_e.pdf, ComponentLink1URL=http://www.yuden.co.jp/productdata/catalog/en/mlcc06_e.pdf, Features=-, Height - Seated (Max)=-, Lead Spacing=-, Lead Style=-, Mounting Type="Surface Mount, MLCC", Packaging="Cut Tape (CT)", Part Status=Active, Pricing 1="1=0.51, 10=0.362, 25=0.3092, 50=0.274, 100=0.2387, 250=0.20328, 500=0.17678, 1000=0.15026 (USD)", ROHS="RoHS Compliant", Size / Dimension="0.126\" L x 0.063\" W (3.20mm x 1.60mm)", Stock 1=533940, Supplier 1=Digi-Key, Thickness (Max)="0.071\" (1.80mm)"
C2 C3: library part CAP_C_0.1µF/16V, "CAP ALUM POLY 100UF 20% 16V T/H", Capacitance=100UF, MANUFACTURER="Murata Electronics North America", Manufacturer Part Number=490-16313-2-ND, Operating Temperature="-55°C ~ 85°C", Package / Case="Radial, Can", Ratings=-, Supplier Part Number 1=493-3716-ND, Temperature Coefficient=X5R, Tolerance=±10%, Voltage - Rated=16V, Applications="General Purpose", Category=Capacitors, ComponentLink1Description=http://www.murata.com/~/media/webrenewal/support/library/catalog/products/capacitor/mlcc/c02e.ashx, ComponentLink1URL=http://www.murata.com/~/media/webrenewal/support/library/catalog/products/capacitor/mlcc/c02e.ashx, Features=-, Height - Seated (Max)=-, Lead Spacing=-, Lead Style=-, Mounting Type="Surface Mount, MLCC", Packaging="Cut Tape (CT)", Part Status=Active, Pricing 1="1=0.1, 10=0.062, 25=0.0456, 50=0.034, 100=0.0278, 250=0.02328, 500=0.01988, 1000=0.01562, 5000=0.01307 (USD)", ROHS="RoHS Compliant", Size / Dimension=1206, Stock 1=958509, Supplier 1=Digi-Key, Thickness (Max)="0.022\" (0.55mm)"
C4: library part CAP_C_0.1µF/16V, "CAP CER SMD 0.1µF/16V", Capacitance=0.1µF, MANUFACTURER="Murata Electronics North America", Manufacturer Part Number=GRM155R61H104KE19D, Operating Temperature="-55°C ~ 85°C", Package / Case="0402 (1005 Metric)", Ratings=-, Supplier Part Number 1=490-3896-1-ND, Temperature Coefficient=X5R, Tolerance=±10%, Voltage - Rated=16V, Applications="General Purpose", Category=Capacitors, ComponentLink1Description=http://www.murata.com/~/media/webrenewal/support/library/catalog/products/capacitor/mlcc/c02e.ashx, ComponentLink1URL=http://www.murata.com/~/media/webrenewal/support/library/catalog/products/capacitor/mlcc/c02e.ashx, Features=-, Height - Seated (Max)=-, Lead Spacing=-, Lead Style=-, Mounting Type="Surface Mount, MLCC", Packaging="Cut Tape (CT)", Part Status=Active, Pricing 1="1=0.1, 10=0.062, 25=0.0456, 50=0.034, 100=0.0278, 250=0.02328, 500=0.01988, 1000=0.01562, 5000=0.01307 (USD)", ROHS="RoHS Compliant", Size / Dimension="0.039\" L x 0.020\" W (1.00mm x 0.50mm)", Stock 1=958509, Supplier 1=Digi-Key, Thickness (Max)="0.022\" (0.55mm)"
C5 C12 C14 C30 C32 C39 C41 C55 C57 C61 C62 C63 C64 C67: library part CAP_C_0.1µF/16V, "CAP CER SMD 0.1µF/16V", MANUFACTURER="Murata Electronics North America", Manufacturer Part Number=GRM155R61H104KE19D, Operating Temperature="-55°C ~ 85°C", Package / Case="0402 (1005 Metric)", Ratings=-, Supplier Part Number 1=490-11917-1-ND, Temperature Coefficient=X5R, Tolerance=±10%, Voltage - Rated=16V, Applications="General Purpose", Category=Capacitors, ComponentLink1Description=http://www.murata.com/~/media/webrenewal/support/library/catalog/products/capacitor/mlcc/c02e.ashx, ComponentLink1URL=http://www.murata.com/~/media/webrenewal/support/library/catalog/products/capacitor/mlcc/c02e.ashx, Features=-, Height - Seated (Max)=-, Lead Spacing=-, Lead Style=-, Mounting Type="Surface Mount, MLCC", Packaging="Cut Tape (CT)", Part Status=Active, Pricing 1="1=0.1, 10=0.062, 25=0.0456, 50=0.034, 100=0.0278, 250=0.02328, 500=0.01988, 1000=0.01562, 5000=0.01307 (USD)", ROHS="RoHS Compliant", Size / Dimension="0.039\" L x 0.020\" W (1.00mm x 0.50mm)", Stock 1=958509, Supplier 1=Digi-Key, Thickness (Max)="0.022\" (0.55mm)"
  C5 C12 C14 C30 C32 C39 C41 C55 C57 C61 C67: Capacitance=0.1µF
  C62 C63 C64: Capacitance=1nF
C7 C25 C34: library part CAP_C_0.1µF/16V, "CAP CER SMD 0.1µF/16V", MANUFACTURER="Murata Electronics North America", Manufacturer Part Number=GRM155R61H104KE19D, Operating Temperature="-55°C ~ 85°C", Package / Case="0402 (1005 Metric)", Ratings=-, Supplier Part Number 1=311-1088-1-ND, Temperature Coefficient=X5R, Tolerance=±10%, Voltage - Rated=16V, Applications="General Purpose", Capacitance=0.1µF, Category=Capacitors, ComponentLink1Description=http://www.murata.com/~/media/webrenewal/support/library/catalog/products/capacitor/mlcc/c02e.ashx, ComponentLink1URL=http://www.murata.com/~/media/webrenewal/support/library/catalog/products/capacitor/mlcc/c02e.ashx, Features=-, Height - Seated (Max)=-, Lead Spacing=-, Lead Style=-, Mounting Type="Surface Mount, MLCC", Packaging="Cut Tape (CT)", Part Status=Active, Pricing 1="1=0.1, 10=0.062, 25=0.0456, 50=0.034, 100=0.0278, 250=0.02328, 500=0.01988, 1000=0.01562, 5000=0.01307 (USD)", ROHS="RoHS Compliant", Size / Dimension="0.039\" L x 0.020\" W (1.00mm x 0.50mm)", Stock 1=958509, Supplier 1=Digi-Key, Thickness (Max)="0.022\" (0.55mm)"
C8 C27 C36: library part CAP_C_0.1µF/16V, "CAP CER SMD 56pF", Capacitance=0.1µF, MANUFACTURER="Murata Electronics North America", Manufacturer Part Number=06035A560JAT2A, Operating Temperature="-55°C ~ 85°C", Package / Case="0402 (1005 Metric)", Ratings=-, Supplier Part Number 1=478-1172-1-ND, Temperature Coefficient=X5R, Tolerance=±10%, Voltage - Rated=16V, Applications="General Purpose", Category=Capacitors, ComponentLink1Description=http://www.murata.com/~/media/webrenewal/support/library/catalog/products/capacitor/mlcc/c02e.ashx, ComponentLink1URL=http://www.murata.com/~/media/webrenewal/support/library/catalog/products/capacitor/mlcc/c02e.ashx, Features=-, Height - Seated (Max)=-, Lead Spacing=-, Lead Style=-, Mounting Type="Surface Mount, MLCC", Packaging="Cut Tape (CT)", Part Status=Active, Pricing 1="1=0.1, 10=0.062, 25=0.0456, 50=0.034, 100=0.0278, 250=0.02328, 500=0.01988, 1000=0.01562, 5000=0.01307 (USD)", ROHS="RoHS Compliant", Size / Dimension="0.039\" L x 0.020\" W (1.00mm x 0.50mm)", Stock 1=958509, Supplier 1=Digi-Key, Thickness (Max)="0.022\" (0.55mm)"
C9 C26 C35: library part CAP_C_0.1µF/16V, "CAP CER SMD 56pF", Capacitance=0.1µF, MANUFACTURER="Murata Electronics North America", Manufacturer Part Number=GRM155R61H104KE19D, Operating Temperature="-55°C ~ 85°C", Package / Case="0402 (1005 Metric)", Ratings=-, Supplier Part Number 1=490-11917-1-ND, Temperature Coefficient=X5R, Tolerance=±10%, Voltage - Rated=16V, Applications="General Purpose", Category=Capacitors, ComponentLink1Description=http://www.murata.com/~/media/webrenewal/support/library/catalog/products/capacitor/mlcc/c02e.ashx, ComponentLink1URL=http://www.murata.com/~/media/webrenewal/support/library/catalog/products/capacitor/mlcc/c02e.ashx, Features=-, Height - Seated (Max)=-, Lead Spacing=-, Lead Style=-, Mounting Type="Surface Mount, MLCC", Packaging="Cut Tape (CT)", Part Status=Active, Pricing 1="1=0.1, 10=0.062, 25=0.0456, 50=0.034, 100=0.0278, 250=0.02328, 500=0.01988, 1000=0.01562, 5000=0.01307 (USD)", ROHS="RoHS Compliant", Size / Dimension="0.039\" L x 0.020\" W (1.00mm x 0.50mm)", Stock 1=958509, Supplier 1=Digi-Key, Thickness (Max)="0.022\" (0.55mm)"
C10 C17 C21 C24 C43 C44 C45 C46 C47 C48 C54 C65 C66 C111: library part CAP_C_0.1µF/16V, "CAP CER SMD 0.1µF/16V", Capacitance=1nF, MANUFACTURER="Murata Electronics North America", Manufacturer Part Number=GRM155R61H104KE19D, Operating Temperature="-55°C ~ 85°C", Ratings=-, Supplier Part Number 1=490-11917-1-ND, Temperature Coefficient=X5R, Tolerance=±10%, Voltage - Rated=16V, Applications="General Purpose", Category=Capacitors, ComponentLink1Description=http://www.murata.com/~/media/webrenewal/support/library/catalog/products/capacitor/mlcc/c02e.ashx, ComponentLink1URL=http://www.murata.com/~/media/webrenewal/support/library/catalog/products/capacitor/mlcc/c02e.ashx, Features=-, Height - Seated (Max)=-, Lead Spacing=-, Lead Style=-, Mounting Type="Surface Mount, MLCC", Packaging="Cut Tape (CT)", Part Status=Active, Pricing 1="1=0.1, 10=0.062, 25=0.0456, 50=0.034, 100=0.0278, 250=0.02328, 500=0.01988, 1000=0.01562, 5000=0.01307 (USD)", ROHS="RoHS Compliant", Size / Dimension="0.039\" L x 0.020\" W (1.00mm x 0.50mm)", Stock 1=958509, Supplier 1=Digi-Key, Thickness (Max)="0.022\" (0.55mm)"
C11 C13 C29 C31 C38 C40 C56: library part CAP_C_0.1µF/16V, "CAP CER SMD 0.1µF/16V", Capacitance=0.1µF, MANUFACTURER="Murata Electronics North America", Manufacturer Part Number=GRM155R61H104KE19D, Operating Temperature="-55°C ~ 85°C", Package / Case="0402 (1005 Metric)", Ratings=-, Supplier Part Number 1=490-11917-1-ND, Temperature Coefficient=X5R, Tolerance=±10%, Voltage - Rated=16V, Applications="General Purpose", Category=Capacitors, ComponentLink1Description=http://www.murata.com/~/media/webrenewal/support/library/catalog/products/capacitor/mlcc/c02e.ashx, ComponentLink1URL=http://www.murata.com/~/media/webrenewal/support/library/catalog/products/capacitor/mlcc/c02e.ashx, Features=-, Height - Seated (Max)=-, Lead Spacing=-, Lead Style=-, Mounting Type="Surface Mount, MLCC", Packaging="Cut Tape (CT)", Part Status=Active, Pricing 1="1=0.1, 10=0.062, 25=0.0456, 50=0.034, 100=0.0278, 250=0.02328, 500=0.01988, 1000=0.01562, 5000=0.01307 (USD)", ROHS="RoHS Compliant", Size / Dimension="0.039\" L x 0.020\" W (1.00mm x 0.50mm)", Stock 1=958509, Supplier 1=Digi-Key, Thickness (Max)="0.022\" (0.55mm)"
C16 C49 C58: library part CAP, "CAP ALUM 470UF 20% 50V RADIAL", Part Number=871-B41896E6477M000
C18 C20 C112 C113 C114: "Capacitor (Semiconductor SIM Model)", LatestRevisionDate=29-May-2009, LatestRevisionNote="IPC-7351 Footprint Added.", PackageDescription="Chip Capacitor", PackageReference=C1206, Published=8-Jun-2000, Publisher="Altium Limited"
C50 C51 C115 C116: library part "CAP NP", "CAP CER 22UF 10V X5R 0603", Part Number=GRM188R61A226ME15D
C59: library part CAP_C_10µF/10V, "CAP CER SMD 10µF/10V", MANUFACTURER=Yageo, Manufacturer Part Number=CC0805ZKY5V6BB106, Operating Temperature="-30°C ~ 85°C", Package / Case="0805 (2012 Metric)", Ratings=-, Supplier Part Number 1=311-1355-1-ND, Temperature Coefficient="Y5V (F)", Tolerance="-20%, +80%", Voltage - Rated=10V, Applications="General Purpose", Capacitance=10µF, Category=Capacitors, ComponentLink1Description=http://www.yageo.com/documents/recent/UPY-GPHC_Y5V_6.3V-to-50V_8.pdf, ComponentLink1URL=http://www.yageo.com/documents/recent/UPY-GPHC_Y5V_6.3V-to-50V_8.pdf, Failure Rate=-, Features=-, Height - Seated (Max)=-, Lead Spacing=-, Lead Style=-, Mounting Type="Surface Mount, MLCC", Packaging="Cut Tape (CT)", Part Status=Active, Pricing 1="1=0.18, 10=0.131, 25=0.0956, 50=0.0742, 100=0.0615, 250=0.05088, 500=0.04312, 1000=0.03569 (USD)", ROHS="RoHS Compliant", Size / Dimension="0.079\" L x 0.049\" W (2.00mm x 1.25mm)", Stock 1=595702, Supplier 1=Digi-Key, Thickness (Max)="0.049\" (1.25mm)"
C60: library part CAP_C_0.1µF/16V, "CAP CER SMD 0.1µF/16V", MANUFACTURER="Murata Electronics North America", Manufacturer Part Number=CC0603KRX7R7BB104, Operating Temperature="-55°C ~ 85°C", Package / Case=0603, Ratings=-, Supplier Part Number 1=311-1088-1-ND, Temperature Coefficient=X5R, Tolerance=±10%, Voltage - Rated=16V, Applications="General Purpose", Capacitance=0.1µF, Category=Capacitors, ComponentLink1Description=http://www.murata.com/~/media/webrenewal/support/library/catalog/products/capacitor/mlcc/c02e.ashx, ComponentLink1URL=http://www.murata.com/~/media/webrenewal/support/library/catalog/products/capacitor/mlcc/c02e.ashx, Features=-, Height - Seated (Max)=-, Lead Spacing=-, Lead Style=-, Mounting Type="Surface Mount, MLCC", Packaging="Cut Tape (CT)", Part Status=Active, Pricing 1="1=0.1, 10=0.062, 25=0.0456, 50=0.034, 100=0.0278, 250=0.02328, 500=0.01988, 1000=0.01562, 5000=0.01307 (USD)", ROHS="RoHS Compliant", Size / Dimension="0.039\" L x 0.020\" W (1.00mm x 0.50mm)", Stock 1=958509, Supplier 1=Digi-Key, Thickness (Max)="0.022\" (0.55mm)"
C101 C102 C103: library part CAP_C_0.1µF/16V, "CAP CER SMD 10uF", Capacitance=0.1µF, Operating Temperature="-55°C ~ 85°C", Package / Case=0603, Ratings=-, Temperature Coefficient=X5R, Tolerance=±10%, Applications="General Purpose", Category=Capacitors, ComponentLink1Description=http://www.murata.com/~/media/webrenewal/support/library/catalog/products/capacitor/mlcc/c02e.ashx, ComponentLink1URL=http://www.murata.com/~/media/webrenewal/support/library/catalog/products/capacitor/mlcc/c02e.ashx, Features=-, Height - Seated (Max)=-, Lead Spacing=-, Lead Style=-, Mounting Type="Surface Mount, MLCC", Packaging="Cut Tape (CT)", Part Status=Active, Pricing 1="1=0.1, 10=0.062, 25=0.0456, 50=0.034, 100=0.0278, 250=0.02328, 500=0.01988, 1000=0.01562, 5000=0.01307 (USD)", ROHS="RoHS Compliant", Thickness (Max)="0.022\" (0.55mm)"
D2: library part LED, "LED GREEN CLEAR THIN 0603 SMD", Distributor Part Number=160-1443-1-ND, Manufacturer Part Number=160-1443-2-ND, PACKAGE=0603, Supplier Part Number 1=LTL-1CHG-BAG, Part Number=160-1443-2-ND, Supplier 1="Future Electronics", Type=Diode
FB1 FB2 FB3 FB4: library part INDUCTOR_Dup1, "Ferrite Beads 1.5K OHM 25%", Distributor Part Number=MMZ2012Y152B, PACKAGE=0603, Supplier Part Number 1=445-1560-1-ND, Manufacturer Part Number=MMZ2012Y152B, Part Number=MMZ2012Y152B, Supplier 1=Digi-Key, Type=Ferrite
J2: library part 5_PIN_CON_0, "CONN HEADER VERT 5POS 2.54MM", Part Number=61300511121, Supplier Part Number 1=732-5318-ND, Supplier 1=Digi-Key
L1 L2 L3 L4 L5 L6 L7 L8: library part INDUCTOR, "FERRITE BEAD 120 OHM 0603 1LN", Part Number=490-3996-1-ND, Supplier Part Number 1=BLM18SG121TN1D, Supplier 1=Arrow
P1 P3: "Header, 6-Pin, Dual row", LatestRevisionDate=17-Jul-2002, LatestRevisionNote="Re-released for DXP Platform.", Publisher="Altium Limited"
P2: "Header, 2-Pin", LatestRevisionDate=17-Jul-2002, LatestRevisionNote="Re-released for DXP Platform.", Publisher="Altium Limited"
P5: "Header, 3-Pin, Dual row", LatestRevisionDate=17-Jul-2002, LatestRevisionNote="Re-released for DXP Platform.", Publisher="Altium Limited"
P6: "Header, 3-Pin", LatestRevisionDate=17-Jul-2002, LatestRevisionNote="Re-released for DXP Platform.", Publisher="Altium Limited"
PS1: library part LD05-23B03R2, "Enclosed AC DC Converters 1 Uitgang 3.3V 1.515A 85 ~ 305 VAC, 100 ~ 430 VDC Input", PACKAGE="CUSTOM-4 MORNSUN", Availability="In Stock", Check_prices=https://www.snapeda.com/parts/LD05-23B03R2/MORNSUN/view-part/5823548/?ref=eda, MF=MORNSUN, MP=LD05-23B03R2, Price=None, SnapEDA_Link=https://www.snapeda.com/parts/LD05-23B03R2/MORNSUN/view-part/5823548/?ref=snap
Q1 Q2: "N-Channel JFET", Code_JEDEC=TO-254-AA, LatestRevisionDate=17-Jul-2002, LatestRevisionNote="Re-released for DXP Platform.", PackageReference=TO-254-AA, Published=8-Jun-2000, Publisher="Altium Limited"
Q3 Q4 Q5: "P-Channel MOSFET", LatestRevisionDate=17-Jul-2002, LatestRevisionNote="Re-released for DXP Platform.", PackageDescription="TO, Flat Index; 3 In-Line, Axial Leads; Body Dia. 4.6mm; Lead Dia. 0.5 mm (max)", PackageReference=E3, PackageVersion=1995/1996, Published=8-Jun-2000, Publisher="Altium Limited"
Q6: library part "MOSFET N", "MOSFET N-CH 50V 220MA SOT-23", Part Number=BSS138CT-ND
R1 R2 R3 R4 R5 R10 R13 R15 R17 R39 R40 R41 R45 R46 R47 R111 R112 R113: library part R, "RES SMD 4.7K OHM 1% 1/16W 0603", PACKAGE=0603, Part Number=RR08P4.7KDTR-ND, Type=Resistor
R6 R7 R8 R61 R62 R73 R74 R75 R76 R81: library part R, "RES SMD 4.7K OHM 1% 1/16W 0603", PACKAGE=0603, Part Number=311-10KGRTR-ND, Type=Resistor
R9 R24 R72 R77 R78 R79: library part R, "RES SMD 470 OHM 1% 1/10W 0603", PACKAGE=0603, Part Number=311-470HRCT-ND, Type=Resistor
R11 R12: library part R, "RES SMD 10K OHM 1% 1/16W 0603", PACKAGE=0603, Part Number=RR08P4.7KDTR-ND, Type=Resistor
R14 R19 R33 R43 R49 R51 R52 R53 R54 R55 R56 R57 R58 R59 R60 R71 R86 R101: library part R, "RES SMD 49.9 OHM 1% 1/16W 0603", PACKAGE=0603, Part Number=RR08P4.7KDTR-ND, Type=Resistor
R16 R18 R114 R115 R116: library part Res3, "RES SMD 10K OHM 1% 1/16W 0603", LatestRevisionDate=29-May-2009, LatestRevisionNote="IPC-7351 Footprint Added.", PackageDescription="Chip Resistor", PackageReference=J1-0603, Published=8-Jun-2000, Publisher="Altium Limited"
R20: library part R, "RES SMD 0E OHM 5% 1/10W 0603", PACKAGE=0603, Type=Resistor
R21: library part R, "RES SMD 1K OHM 5% 1/10W 0603", Distributor Part Number=1276-3466-2-ND, MANUFACTURER=Samsung, PACKAGE=0603, Part Number=311-1.0KGRTR-ND, Rating=1/16W, Tolerance=1%, Distributor=Digikey, Manufacturer Part Number=1276-3466-2-ND, Type=Resistor
R22 R36 R37 R38 R70: library part R, "RES SMD 1K OHM 5% 1/10W 0603", PACKAGE=0603, Part Number=311-1.0KGRTR-ND, Type=Resistor
R23: library part R, "RES SMD 2K OHM 1% 1/10W 0603", PACKAGE=0603, Part Number=YAG1297CT-ND, Type=Resistor
R35: library part R, "RES SMD 1K OHM 5% 1/10W 0603", PACKAGE=0603, Part Number=RNCP0603FTD75R0TR-ND, Type=Resistor
R44: library part R, Type=Resistor
R50: library part R, "RES SMD", Type=Resistor
R63 R64 R65: library part R, "RES SMD 4.7K OHM 1% 1/16W 0603", Distributor Part Number=1276-3466-2-ND, MANUFACTURER=Samsung, PACKAGE=0603, Part Number=P4.7KBDCT-ND, Rating=1/16W, Tolerance=1%, Distributor=Digikey, Manufacturer Part Number=1276-3466-2-ND, Type=Resistor
R66 R67 R68 R69: library part R, "RES SMD 4.7K OHM 1% 1/16W 0603", Distributor Part Number=1276-3466-2-ND, MANUFACTURER=Samsung, PACKAGE=0603, Part Number=P4.7KDBCT-ND, Rating=1/16W, Tolerance=1%, Distributor=Digikey, Manufacturer Part Number=1276-3466-2-ND, Type=Resistor
R80: library part R, "THERMISTOR NTC 10KOHM 3380K 0603", PACKAGE=0603, Part Number=490-16279-2-ND, Type=Resistor
S1: "SWITCH TACTILE SPST-NO 0.05A 12V", Part Number=TL1105SF160Q, LatestRevisionDate=17-Jul-2002, LatestRevisionNote="Re-released for DXP Platform.", PackageDescription="Switch; 2 Leads", PackageReference=SPST-2, Published=24-Mar-1999, Publisher="Altium Limited"
S2 S3: "Switch", LatestRevisionDate=17-Jul-2002, LatestRevisionNote="Re-released for DXP Platform.", PackageDescription="Switch; 2 Leads", PackageReference=SPST-2, Published=24-Mar-1999, Publisher="Altium Limited"
T1 T2 T3 T4 T5 T6 T7 T8 T9 T10 T11 T12 T13 T14 T15: library part Test_P
U1 U22 U24: library part TLV70033DDCT, "3.3V LDO", Current - Limit (Min)=220mA, Current - Output=200mA, MANUFACTURER="Texas Instruments", Manufacturer Part Number=LM1117, Operating Temperature="-40°C ~ 125°C", Package / Case="SOT-23-5 Thin, TSOT-23-5", Supplier Device Package=SOT-23-5, Supplier Part Number 1=LM1117IMP-3.3/NOPBCT-ND, Voltage - Dropout (Typical)=-, Voltage - Input="Up to 5.5V", Voltage - Output=3.3V, Category="Integrated Circuits (ICs)", ComponentLink1Description=http://www.ti.com/lit/ds/slvsa00e/slvsa00e.pdf, ComponentLink1URL=http://www.ti.com/lit/ds/slvsa00e/slvsa00e.pdf, Mounting Type="Surface Mount", Packaging="Cut Tape (CT)", Part Status=Active, Pricing 1="1=0.53, 10=0.452, 100=0.3374 (USD)", Regulator Topology="Positive Fixed", ROHS="RoHS Compliant", Stock 1=5021, Supplier 1=Digi-Key
U2: library part RGB_LED_PTH_0, Part Number=754-1492-ND, Supplier Part Number 1=754-1615-ND, Supplier 1=Digi-Key
U3: library part SCD4x
U4: library part TGS2602_1, Part Number=TGS2602, Supplier Part Number 1=1346640, Supplier 1=RSComponents
U5: "AIR QUALITY GAS SENSOR FOR VOC'S", PACKAGE=None, Availability=Unavailable, Check_prices=https://www.snapeda.com/parts/SGP30/Sensirion%20AG/view-part/1413307/?ref=eda, MF="Sensirion AG", MP=SGP30, Price=None, SnapEDA_Link=https://www.snapeda.com/parts/SGP30/Sensirion%20AG/view-part/1413307/?ref=snap
U6 U7 U15 U28 U101: "LM258 Series 30 V 1.1 MHz Low Power Dual Operational Amplifier - SOIC-8", PACKAGE="SOIC-8 STMicroelectronics", Supplier Part Number 1=296-6624-5-ND, Availability=Unavailable, MF="Texas Instruments", MP=LM258D, Price=None, SnapEDA_Link=https://www.snapeda.com/parts/LM258D/Texas%20Instruments/view-part/588352/?ref=snap, Supplier 1=Digi-Key
U8: library part Spec_figaro_pth_0, "SENS GAS SULF DIOX ANALG CUR MOD", Part Number=1684-1042-ND, Supplier 1=Digi-Key, Supplier Part Number 1=1684-1042-ND
U9: library part Spec_figaro_pth_0, "SENS GAS SULF DIOX ANALG CUR MOD", Part Number=1684-1042-ND, Supplier Part Number 1=1684-1009-ND, Supplier 1=Digi-Key
U10: library part Spec_figaro_pth_0, "SENS GAS SULF DIOX ANALG CUR MOD", Supplier Part Number 1=1684-1021-ND, Supplier 1=Digi-Key
U11 U12: "1 Channel AFE 8 Bit 14-WSON _4x4_", PACKAGE="WFDFN-14 Texas Instruments", Availability=Unavailable, MF="Texas Instruments", MP=LMP91000SD/NOPB, Price=None, SnapEDA_Link=https://www.snapeda.com/parts/LMP91000SD/NOPB/Texas%20Instruments/view-part/547082/?ref=snap
U13: "1 Channel AFE 8 Bit 14-WSON _4x4_", PACKAGE="WFDFN-14 Texas Instruments", Supplier Part Number 1=296-44382-1-ND, Availability=Unavailable, MF="Texas Instruments", MP=LMP91000SD/NOPB, Price=None, SnapEDA_Link=https://www.snapeda.com/parts/LMP91000SD/NOPB/Texas%20Instruments/view-part/547082/?ref=snap, Supplier 1=Digi-Key
U14: library part MICS6814_0, Supplier Part Number 1=50AH3069, Supplier 1=Newark
U16: library part TGS5141, Part Number=TGS5141-P00
U17: library part PROG_ESP32_0, Part Number=490107670412, Supplier Part Number 1=455-1660-ND, Supplier 1=Digi-Key
U18: library part MP1584_SOIC_0, "IC RTC CLK/CALENDAR I2C 8-SOIC", Supplier Part Number 1=36X2971, Supplier 1=Newark
U19 U20: library part ADS1115, "IC ADC 16BIT SIGMA-DELTA 10VSSOP", Part Number=595-ADS1115IDGST, Supplier Part Number 1=296-24934-1-ND, Supplier 1=Digi-Key
U21: library part ESP32_SMD_1, "WIFI MODULE 128MBITS SPI FLASH", Part Number=356-ES32WROOM32D16MB, Supplier 1=Mouser, Supplier Part Number 1=356-ES32WROOM32D16MB
U23: library part CON_AC_1, "CONN HEADER VERT 2POS 2.54MM", Part Number=609-4434-ND, Supplier Part Number 1=62K8865, Supplier 1=Newark
VR1 VR2 VR3: "Precision Micropower Low Dropout Voltage Reference 5-SOT-23 -40 to 85", PACKAGE="SOT-23 Texas Instruments", Supplier Part Number 1=LM4120AIM5-2.5/NOPBCT-ND, Availability=Unavailable, MF="Texas Instruments", MP=LM4120AIM5-2.5, Price=None, SnapEDA_Link=https://www.snapeda.com/parts/LM4120AIM5-2.5/Texas%20Instruments/view-part/30670/?ref=snap, Supplier 1=Digi-Key
VR4: library part "Metal Oxide Variaster", "SMT Resistor"
X1: library part XTAL_2-pin, "XTAL SMD 3215, 32.768kHz, Cl=9pF, Total Tol: ±50ppm", Part Number=XC1911TR-ND, Supplier Part Number 1=535-9033-1-ND, Artikkelnr Noca=N.A., Artikkelnr Simpro=N.A., Footprint Doc=XTAL_3215, LatestRevisionDate=2016-08-19, Note="XTAL SMD 32.768kHz", Pin Count=2, Published=2016-08-19, Publisher="Nordic Semiconductor", Supplier 1=Digi-Key
ZD1: "Zener Diode", LatestRevisionDate=17-Jul-2002, LatestRevisionNote="Re-released for DXP Platform.", PackageDescription="Diode, Thru-Hole; 2 Leads; 0.7 in Pin Spacing", PackageReference=DIODE-0.7, Published=8-Jun-2000, Publisher="Altium Limited"

## Free pads (board coordinates)
  round 3 hole 3 unplated: 0(89,9) 0(89,81) 0(151,9) 0(151,81)
  oval 0.5x10 hole 0.5 slot 10 at 90 deg unplated: 2(138.975,82.45)
  oval 10x0.5 hole 0.5 slot 10 at 140 deg unplated rot 140: 3(142.65,74.575)
  oval 4.1x0.5 hole 0.5 slot 4.1 at 0 deg unplated: 4(148.175,71.435)
  oval 0.5x6 hole 0.5 slot 6 at 90 deg unplated: 5(150.1,68.675)
  oval 1x28 hole 1 slot 28 at 90 deg unplated: 6(127.8,74.8)
  oval 20x5 hole 5 square unplated: 7(111.875,2.05)
  round 1 smd mask+0.5: ""(2.425,4.524) ""(3.15,84.775) ""(76.9,86.9) ""(83.081,2.274) ""(157.475,87.475)
  round 1 smd far side mask+0.5: ""(2.425,4.524) ""(3.15,84.775) ""(76.9,86.9) ""(83.081,2.274) ""(157.475,87.475)
  round 4 hole 4 unplated: ""(9,3) ""(9,87) ""(70.925,87) ""(71,3)
  oval 0.6x5 hole 0.6 slot 5 at 90 deg unplated: ""(9.875,50.8) ""(15.89,50.8) ""(32.673,50.875) ""(38.688,50.875) ""(55.287,50.9) ""(61.302,50.9)
  oval 6.6x0.6 hole 0.6 slot 6.6 at 0 deg unplated: ""(12.883,48.59) ""(35.681,48.665) ""(58.295,48.69)
  oval 0.6x4 hole 0.6 slot 4 at 90 deg unplated: ""(47.265,25.181)
  oval 9x0.6 hole 0.6 slot 9 at 0 deg unplated: ""(52.426,22.51)
  oval 0.6x8 hole 0.6 slot 8 at 90 deg unplated: ""(60.626,28.7)
  round 5 hole 5 unplated: ""(89,3) ""(89,87) ""(151,3) ""(151,87)

## Via types
v1: diameter 0.6, hole 0.25, Top Layer to Bottom Layer, tented both sides, 365 vias